# Altium PCB PCB_V1.PcbDoc
Units mm, origin at the board's own origin, x right, y up, seen from the top; angles counter-clockwise.
Board outline 152.4 x 101.6 mm, 2 copper layers (Top Layer, Bottom Layer); 43 components, 25 nets, 151 pads, 0 vias.
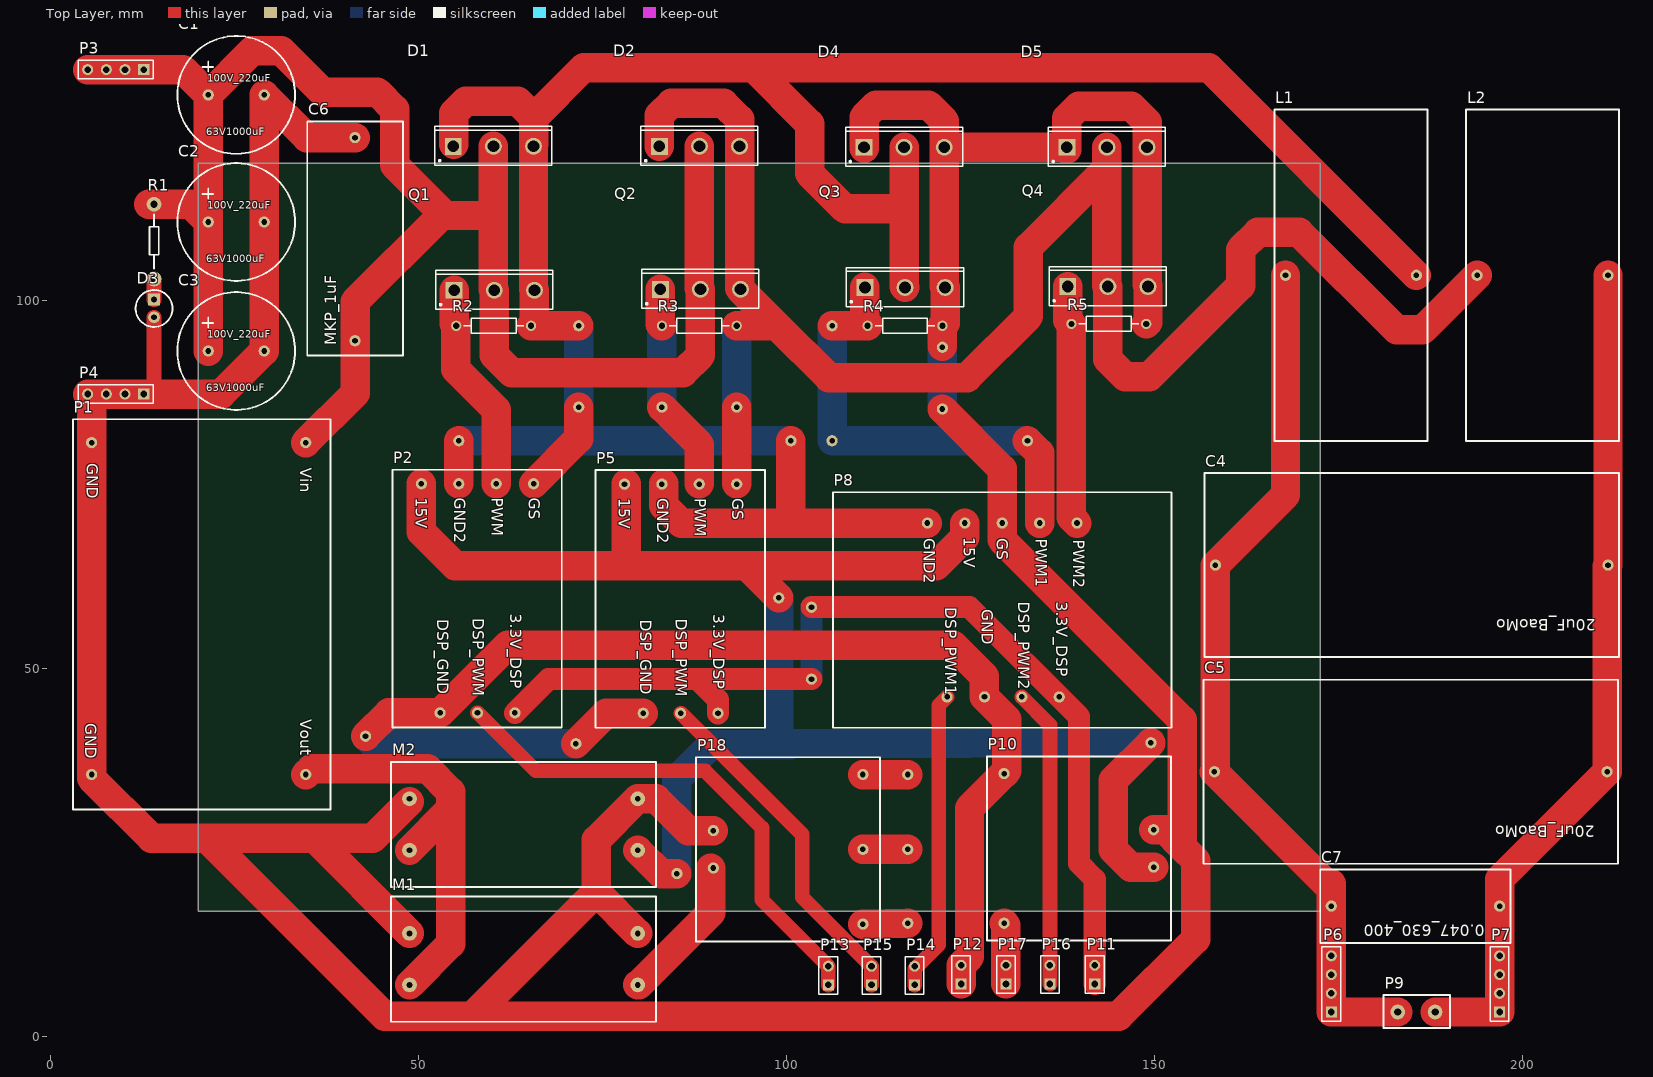
[diagram p0: Top Layer view]
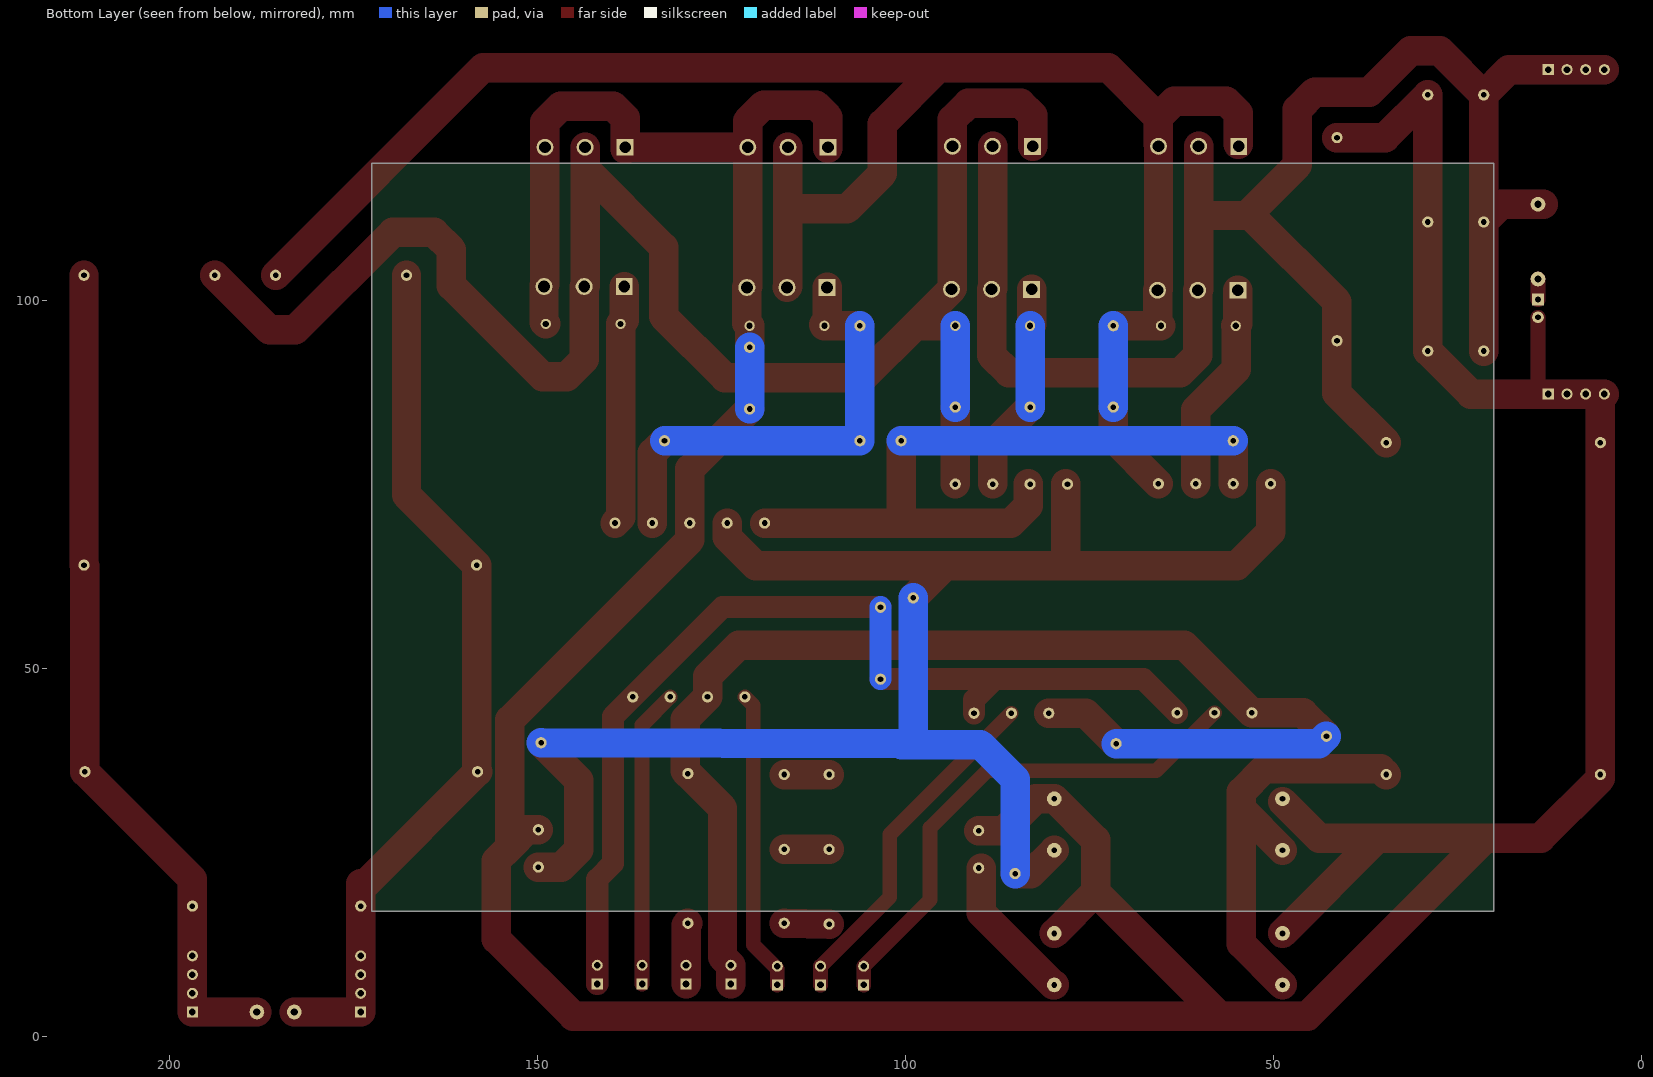
[diagram p1: Bottom Layer view, seen from below]

## Layer stack, top to bottom
Top Solder: solder mask 0.0102, Solder Resist, Dk 3.5
Top Layer: signal copper 0.0356
Dielectric 1: dielectric 0.32, FR-4, Dk 4.8
Bottom Layer: signal copper 0.0356
Bottom Solder: solder mask 0.0102, Solder Resist, Dk 3.5

## Board outline
20.066,17.018 172.466,17.018 172.466,118.618 20.066,118.618

## Design rules (kind name [scope] priority, off if disabled: settings)
Clearance [All] p1: gap=0.254 ignorepadtopadclearanceinfootprint=FALSE except(0: Arc-Hole Track-Hole SMDPad-Hole THPad-Hole Via-Hole Fill-Hole Poly-Hole Region-Hole Text-Hole)
PolygonConnect [All] p1: connectstyle=Relief reliefconductorwidth=0.254 reliefentries=4 polygonreliefangle="90 Angle" airgapwidth=0.254
RoutingVias [All] p1: holewidth=0.711 width=1.27 viastyle="Through Hole" minholewidth=0.711 minwidth=1.27 maxholewidth=0.711 maxwidth=1.27
SolderMaskExpansion [All] p1: expansion=0.102
Width [All] p1: maxlimit=5 minlimit=0.254 preferedwidth=0.254
30 further rules are at their usual default settings.

## Components (designator, comment, footprint, x,y, rotation, side; value= is the part's Value field where it differs from the comment)
C1 "Cap Pol1" C_1000uF_220uF 21.431,127.92 r0 top value=1000uF
C2 "Cap Pol1" C_1000uF_220uF 21.431,110.648 r0 top value=1000uF
C3 "Cap Pol1" C_1000uF_220uF 21.431,93.122 r0 top value=220uF
C4 "Cap Semi" C_20uF_BaoMo 211.582,64.039 r180 top value=20uF
C5 "Cap Semi" C_20uF_BaoMo 211.455,35.972 r180 top value=20uF
C6 "Cap Pol1" C_MKP_1uF 41.37,94.519 r90 top value=1uF
C7 "Cap Semi" C_0047_630_400_47nF 196.85,17.716 r180 top value=47nF
D1 "Diode" SiC-MOS 54.705,120.935 r0 top
D2 "Diode" SiC-MOS 82.699,120.935 r0 top
D3 "LED1" LED 14.065,100.107 r270 top
D4 "Diode" SiC-MOS 110.49,120.808 r0 top
D5 "Diode" SiC-MOS 138.049,120.808 r0 top
L1 "2mH" L_2mH 185.547,103.409 r180 top
L2 "2mH" L_2mH 211.582,103.409 r180 top
M1 "DC/DC_KeTiaoShengYaMoKuai" DC/DC-KeTiaoShengYaMoBan 79.768,7.016 r180 top
M2 "DC/DC_KeTiaoShengYaMoKuai" DC/DC-KeTiaoShengYaMoBan 79.768,25.304 r180 top
P1 "LM2596_Moldel" LM2596_Moldel 3.048,83.851 r270 top
P2 "SiC_Power" SiC_Power 46.45,76.993 r270 top
P3 "Header 4" HDR1X4 12.668,131.349 r180 top
P4 "Header 4" HDR1X4 12.668,87.28 r180 top
P5 "SiC_Power" SiC_Power 74.041,76.941 r270 top
P6 "Header 4" HDR1X4 173.99,3.333 r90 top
P7 "Header 4" HDR1X4 196.85,3.333 r90 top
P8 "SiC_Power_2" SiC_Power_2 106.934,79.152 r270 top
P9 "DuanZi" DuanZi 183.007,3.333 r0 top
P10 "Power_9-36V_5V" Power_9-36V/5V 149.86,23.018 r180 top
P11 "Header 2" HDR1X2 141.859,7.143 r90 top
P12 "Header 2" HDR1X2 123.698,7.143 r90 top
P13 "Header 2" HDR1X2 105.664,7.016 r90 top
P14 "Header 2" HDR1X2 117.39,7.016 r90 top
P15 "Header 2" HDR1X2 111.527,7.016 r90 top
P16 "Header 2" HDR1X2 135.763,7.143 r90 top
P17 "Header 2" HDR1X2 129.794,7.143 r90 top
P18 "Power_18-36V/+-15V" Power_18-36V/-+15V 90.043,25.431 r0 top
Q1 "NMOS-2" SiC-MOS 54.832,101.377 r0 top
Q2 "NMOS-2" SiC-MOS 82.826,101.504 r0 top
Q3 "NMOS-2" SiC-MOS 110.617,101.758 r0 top
Q4 "NMOS-2" SiC-MOS 138.176,101.885 r0 top
R1 "Res2" R 14.065,113.061 r270 top value=20k
R2 "Res2" AXIAL-0.4 60.198,96.551 r180 top value=10k
R3 "Res2" AXIAL-0.4 88.138,96.551 r180 top value=10k
R4 "Res2" AXIAL-0.4 116.078,96.551 r180 top value=10k
R5 "Res2" AXIAL-0.4 143.764,96.805 r180 top value=10k

## Footprints (in the part's own frame and the unit in brackets; to place one, negate y for a bottom-side part, rotate by r counter-clockwise, add the part's x,y. Pads: shape width x height; smd on the part's side, far side on the other; paste and mask are expansions set on the pad)
AXIAL-0.4 [mm] "Axial Device, Thru-Hole; 2 Leads; 0.4 in Pin Spacing"
  round 1.4 hole 0.85: 1(-5.08,0) 2(5.08,0)
  silkscreen extent -4.06,-1.02 4.06,1.02
C_20uF_BaoMo [mil]
  round 60 hole 30: 1(0,0) 2(2100,0)
  silkscreen extent -59,-492 2159,492
C_0047_630_400_47nF [mil]
  round 60 hole 30: 1(0,0) 2(900,0)
  silkscreen extent -59,-197 959,197
C_1000uF_220uF [mil]
  round 60 hole 30: 1(0,0) 2(299.21,0)
  silkscreen extent -165,-315 465,315
C_MKP_1uF [mil]
  round 60 hole 30: 1(0,0) 2(1086.61,0)
  silkscreen extent -79,-256 1173,256
DC/DC-KeTiaoShengYaMoBan [mm]
  round 2 hole 0.8: 1(0,0) 2(0,-7) 3(31,-7) 4(31,0)
  silkscreen extent -2.5,-12 33.5,5
DuanZi [mm]
  round 2 hole 1 unplated: 1(0,0) 2(5.08,0)
  silkscreen extent -1.91,-2.16 7.11,2.29
HDR1X2 [mm] "Connector; Header; 2 Position"
  rect 1.5x1.5 hole 0.9: 1(0,0)
  round 1.5 hole 0.9: 2(2.54,0)
  silkscreen extent -1.27,-1.27 3.81,1.27
HDR1X4 [mm] "Connector; Header; 4 Position"
  rect 1.5x1.5 hole 0.9: 1(0,0)
  round 1.5 hole 0.9: 2(2.54,0) 3(5.08,0) 4(7.62,0)
  silkscreen extent -1.27,-1.27 8.89,1.27
L_2mH [mil]
  round 60 hole 30: 1(0,0) 2(700,0)
  silkscreen extent -59,-886 759,886
LED [mm]
  rect 1.6x1.6 hole 0.8 unplated: 1(0,0)
  round 1.6 hole 0.8 unplated: 2(2.4,0)
  silkscreen extent -1.3,-2.5 3.7,2.5
LM2596_Moldel [mil]
  round 60 hole 30: 1(125,1245) 2(125,100) 3(1900,100) 4(1900,1245)
  silkscreen extent 0,0 2087,1378
Power_9-36V/5V [mil]
  round 60 hole 30: 1(0,0) 2(0,-200) 3(800,-500) 4(800,300)
  silkscreen extent -92,-592 892,392
Power_18-36V/-+15V [mil]
  round 60 hole 30: 1(0,100) 2(0,-100) 3(800,-400) 4(800,400) 5(800,0)
  silkscreen extent -92,-492 892,492
R [mm]
  round 2 hole 1: 1(0,0) 2(10.16,0)
  silkscreen extent 1.4,-0.63 8.76,0.64
SiC-MOS [mm]
  rect 2.3x2.3 hole 1.6: 1(0.011,0)
  round 2.3 hole 1.6: 2(5.461,0) 3(10.911,0)
  silkscreen extent -2.49,-2.6 13.41,2.7, body extent -2.49,-2.6 13.41,2.7, height 24.6
SiC_Power [mil]
  round 60 hole 30: 1(75,755) 2(75,555) 3(75,355) 4(75,155) 5(1300,255) 6(1300,455) 7(1300,655)
  silkscreen extent 0,0 1378,906
SiC_Power_2 [mil]
  round 60 hole 30: 1(370,1280) 2(370,1080) 3(370,880) 4(370,680) 5(370,480) 6(1300,585) 7(1300,785) 8(1300,985) 9(1300,1185)
  silkscreen extent 205,-25 1465,1786

## Part data
C1 C2 C3 C6: "Polarized Capacitor (Radial)", LatestRevisionDate=17-Jul-2002, LatestRevisionNote="Re-released for DXP Platform.", PackageDescription="Polarized Capacitor (Radial); 2 Leads", PackageReference=RB7.6-15, Published=8-Jun-2000, Publisher="Altium Limited"
C4 C5 C7: "Capacitor (Semiconductor SIM Model)", LatestRevisionDate=29-May-2009, LatestRevisionNote="IPC-7351 Footprint Added.", PackageDescription="Chip Capacitor", PackageReference=C1206, Published=8-Jun-2000, Publisher="Altium Limited"
D3: "Typical RED GaAs LED", LatestRevisionDate=08-Jul-2005, LatestRevisionNote="Mech Layer 1 removed.", PackageDescription="LED; 2 Leads", PackageReference=LED-1, Published=8-Jun-2000, Publisher="Altium Limited"
L1 L2: library part L
P3 P4 P6 P7: "Header, 4-Pin", LatestRevisionDate=17-Jul-2002, LatestRevisionNote="Re-released for DXP Platform.", Publisher="Altium Limited"
P11 P12 P13 P14 P15 P16 P17: "Header, 2-Pin", LatestRevisionDate=17-Jul-2002, LatestRevisionNote="Re-released for DXP Platform.", Publisher="Altium Limited"
Q1 Q2 Q3 Q4: "N-Channel Power MOSFET", ComponentLink1Description="Manufacturer Link", ComponentLink1URL=http://www.irf.com/, DatasheetVersion=PD-9.814, LatestRevisionDate=17-Jul-2002, LatestRevisionNote="Re-released for DXP Platform.", Note="Pin 2 is electrically connected to pin 4.", PackageDescription="TO, Thru-Hole, Vertical, Heatsink Mounted; 3 In-Line Leads; Pitch 2.54 mm", PackageReference=TO-220AB, PackageVersion=Feb-1997, Published=8-Jun-2000, Publisher="Altium Limited"
R1 R2 R3 R4 R5: "Resistor", LatestRevisionDate=17-Jul-2002, LatestRevisionNote="Re-released for DXP Platform.", PackageDescription="Axial Device, Thru-Hole; 2 Leads; 0.4 in Pin Spacing", PackageReference=AXIAL-0.4, Published=8-Jun-2000, Publisher="Altium Limited"

## Free pads (board coordinates)
  round 1.524 hole 0.762: 32(71.755,96.551) 33(71.755,85.502) 34(106.172,96.551) 35(121.158,93.63) 36(83.058,85.502) 37(93.218,85.502) 38(121.158,85.248) 39(106.172,80.93) 42(100.584,80.93) 43(55.467,80.93) 44(132.715,80.93) 48(98.933,59.594) 49(85.09,22.129) 50(149.479,39.909) 53(42.799,40.798) 55(71.374,39.782) 56(103.378,48.545) 57(103.378,58.324) 58(116.459,15.398) 59(116.459,25.431) 60(116.459,35.591)

## Nets (pads, with @x,y where several pads share a name; then routed paths per layer and width w, separated by ;. In a path a pad name is that pad's centre, name@x,y a point inside that pad or via, vN(x,y) a via of type N, cw(c..) or ccw(c..) an arc to the next point about the centre after c; other vN are vias at no path point)
5V: 
15V: 
15V2: 
20V2: 
-15V2: 
DSP_3.3V: 
DSP_5V: 
DSP_GND: 
DSP_PWM1: 
DSP_PWM2: 
DSP_PWM3: 
DSP_PWM4: 
GND: 
GND2: 
GS1: 
GS2: 
NetD3_1: 
PWM1: 
PWM2: 
PWM3: 
PWM4: 
VGND: 
Vin: 
VOUT1: 
VOUT2: 
pads on no net: C1.1 C1.2 C2.1 C2.2 C3.1 C3.2 C4.1 C4.2 C5.1 C5.2 C6.1 C6.2 C7.1 C7.2 D1.1 D1.2 D1.3 D2.1 D2.2 D2.3 D3.1 D3.2 D4.1 D4.2 D4.3 D5.1 D5.2 D5.3 L1.1 L1.2 L2.1 L2.2 M1.1 M1.2 M1.3 M1.4 M2.1 M2.2 M2.3 M2.4 P1.1 P1.2 P1.3 P1.4 P2.1 P2.2 P2.3 P2.4 P2.5 P2.6 P2.7 P3.1 P3.2 P3.3 P3.4 P4.1 P4.2 P4.3 P4.4 P5.1 P5.2 P5.3 P5.4 P5.5 P5.6 P5.7 P6.1 P6.2 P6.3 P6.4 P7.1 P7.2 P7.3 P7.4 P8.1 P8.2 P8.3 P8.4 P8.5 P8.6 P8.7 P8.8 P8.9 P9.1 P9.2 P10.1 P10.2 P10.3 P10.4 P11.1 P11.2 P12.1 P12.2 P13.1 P13.2 P14.1 P14.2 P15.1 P15.2 P16.1 P16.2 P17.1 P17.2 P18.1 P18.2 P18.3 P18.4 P18.5 Q1.1 Q1.2 Q1.3 Q2.1 Q2.2 Q2.3 Q3.1 Q3.2 Q3.3 Q4.1 Q4.2 Q4.3 R1.1 R1.2 R2.1 R2.2 R3.1 R3.2 R4.1 R4.2 R5.1 R5.2
copper on no net: | length 2706.6
  Top Layer w2: 12.668,87.28 14.065,88.677 14.065,97.707 ; 14.065,100.107 14.065,102.901 ; 58.007,43.973 58.039,43.973 65.913,36.099 88.9,36.099 96.647,28.352 96.647,18.573 105.664,9.556 105.664,7.016 ; 85.598,43.921 85.65,43.921 102.129,27.442 102.129,18.903 111.476,9.556 111.527,9.556 111.527,7.016 ; 117.39,7.016 117.39,9.217 120.65,12.477 120.65,44.989 121.793,46.132 ; 131.953,46.132 135.763,42.322 135.763,9.763 ; 135.763,7.143 135.763,9.683
  Top Layer w3: 63.087,43.973 67.659,48.545 87.884,48.545 ; 90.678,43.921 90.678,45.751 87.884,48.545 ; 103.378,48.545 87.884,48.545 ; 103.378,58.324 124.841,58.324 139.7,43.465 139.7,23.526 141.859,21.367 141.859,7.143
  Top Layer w4: 5.048,131.349 7.588,131.349 10.128,131.349 12.668,131.349 18.002,131.349 21.431,127.92 ; 13.335,113.061 14.065,113.061 19.018,113.061 21.431,110.648 ; 21.431,93.122 21.431,110.648 ; 34.671,35.591 35.433,36.353 51.251,36.353 54.356,33.248 54.356,30.892 ; 34.671,80.676 41.37,87.375 41.37,94.519 41.37,99.821 53.086,111.537 60.166,111.537 ; 41.37,122.119 34.832,122.119 29.031,127.92 29.031,110.648 29.031,93.122 23.189,87.28 12.668,87.28 10.128,87.28 7.588,87.28 5.048,87.28 5.588,86.74 5.588,80.676 5.588,35.591 5.588,35.083 13.716,26.955 21.177,26.955 ; 42.799,40.798 45.974,43.973 52.927,43.973 62.134,53.18 122.619,53.18 126.873,48.926 126.873,46.132 129.921,43.084 129.921,36.099 129.54,35.718 124.841,31.019 124.841,10.826 123.698,9.683 123.698,7.143 ; 48.768,7.016 54.356,12.604 54.356,30.892 ; 48.768,14.016 35.829,26.955 ; 48.768,25.304 54.356,30.892 ; 48.768,31.923 43.8,26.955 35.829,26.955 ; 50.387,75.088 50.387,68.541 54.952,63.976 78.232,63.976 ; 53.594,111.537 46.736,118.395 46.736,125.958 44.393,128.301 36.957,128.301 31.369,133.889 27.4,133.889 21.431,127.92 ; 54.77,121.189 54.77,125.413 56.388,127.031 63.5,127.031 65.67,124.861 ; 54.843,101.377 54.843,96.826 55.118,96.551 55.031,96.464 55.031,90.669 60.547,85.153 60.547,75.088 ; 55.467,75.088 55.467,80.93 ; 60.166,120.935 60.166,111.537 ; 65.616,120.935 65.616,101.504 65.743,101.377 65.743,97.016 65.278,96.551 71.755,96.551 ; 65.627,75.088 71.755,81.216 71.755,85.502 ; 65.67,121.189 65.67,124.861 ; 71.374,39.782 75.513,43.921 80.518,43.921 ; 78.232,75.088 78.232,63.976 ; 79.768,7.016 79.883,7.016 89.662,16.795 89.662,22.891 ; 79.768,14.016 74.168,19.616 ; 79.768,25.304 82.943,22.129 85.09,22.129 ; 82.71,120.935 82.71,125.159 84.328,126.777 91.44,126.777 93.61,124.607 93.61,120.935 93.61,101.631 93.737,101.504 98.69,96.551 ; 82.837,101.504 82.837,96.772 83.058,96.551 ; 83.058,85.502 88.16,80.4 88.16,75.11 88.138,75.088 ; 83.312,75.088 83.312,72.097 85.655,69.754 100.584,69.754 ; 88.16,120.935 88.16,101.631 88.287,101.504 88.287,92.544 85.944,90.201 62.636,90.201 60.293,92.544 60.293,101.377 60.166,101.504 60.166,111.537 ; 90.043,27.971 86.614,27.971 82.281,32.304 79.768,32.304 74.168,26.704 74.168,19.616 ; 93.218,75.088 93.218,85.502 ; 93.218,96.551 98.69,96.551 ; 98.933,59.594 94.551,63.976 ; 100.584,80.93 100.584,69.754 ; 106.172,96.551 110.998,96.551 ; 110.363,15.271 116.459,15.398 ; 110.363,25.431 116.459,25.431 ; 110.363,35.591 116.459,35.591 ; 110.523,120.681 110.523,124.905 112.141,126.523 119.253,126.523 121.423,124.353 121.423,120.808 ; 110.628,101.758 110.628,97.175 111.125,96.678 ; 115.951,120.808 115.951,112.426 ; 116.078,101.758 115.951,101.885 115.951,112.426 ; 119.126,69.754 100.584,69.754 ; 121.158,85.248 129.286,77.12 129.286,69.754 129.286,67.468 153.733,43.021 153.733,25.875 153.67,25.812 ; 121.158,93.756 121.158,96.551 ; 121.528,96.921 121.528,101.758 121.401,101.885 121.401,120.808 121.423,120.808 ; 124.206,69.754 124.206,67.849 120.333,63.976 94.551,63.976 ; 129.54,15.398 129.794,15.144 129.794,7.143 ; 132.715,80.93 134.366,79.279 134.366,69.754 ; 138.06,120.808 121.423,120.808 ; 138.082,120.554 138.082,124.778 139.7,126.396 146.812,126.396 148.982,124.226 148.982,120.808 ; 138.187,101.885 138.187,97.302 138.684,96.805 138.684,70.516 139.446,69.754 ; 143.51,120.808 143.51,117.887 ; 148.844,96.805 149.087,97.048 149.087,102.092 148.96,102.219 148.96,120.808 ; 149.479,39.909 144.399,34.829 144.399,25.361 146.742,23.018 149.86,23.018 ; 149.86,28.098 151.384,28.098 153.67,25.812 ; 167.767,103.409 167.767,73.564 158.242,64.039 158.242,36.099 158.115,35.972 173.355,20.732 173.99,20.732 173.99,17.716 173.99,10.953 173.99,8.413 173.99,5.873 173.99,3.333 183.007,3.333 ; 185.547,103.409 157.353,131.603 95.504,131.603 ; 188.087,3.333 196.85,3.333 196.85,5.873 196.85,8.413 196.85,10.953 196.85,17.716 196.85,21.367 211.455,35.972 211.455,63.912 211.582,64.039 211.582,103.409 ; 193.802,103.409 186.378,95.985 182.891,95.985 169.625,109.251 164.014,109.251 161.671,106.908 161.671,102.012 149.294,89.635 145.98,89.635 143.637,91.978 143.637,101.885 143.51,102.012 143.51,117.887 ; 21.177,26.955 45.37,2.762 57.314,2.762 ; 21.177,26.955 35.829,26.955 ; 21.431,110.648 21.431,127.92 ; 57.314,2.762 74.168,19.616 ; 57.314,2.762 145.098,2.762 155.575,13.239 155.575,23.907 153.67,25.812 ; 65.67,124.861 72.412,131.603 95.504,131.603 ; 78.232,63.976 94.551,63.976 ; 95.504,131.603 103.124,123.983 103.124,117.252 107.95,112.426 115.951,112.426 ; 98.69,96.551 105.739,89.502 124.523,89.502 132.842,97.821 132.842,107.219 143.51,117.887
  Bottom Layer w3: 103.378,48.545 103.378,58.324
  Bottom Layer w4: 42.799,40.798 43.815,39.782 71.374,39.782 ; 55.467,80.93 100.584,80.93 ; 71.755,85.502 71.755,96.551 ; 83.058,85.502 83.058,96.551 ; 85.09,22.129 85.09,34.956 89.801,39.667 100.469,39.667 100.592,39.79 149.479,39.909 ; 93.218,85.502 93.218,96.551 ; 98.933,39.667 98.933,59.594 ; 106.172,96.551 106.172,80.93 132.08,80.93 132.715,80.93 ; 121.158,85.248 121.158,93.63

## Text inside footprints (layer, text, board x,y; h text height)
C1: Top Overlay "100V_220uF" at 21.304,129.698 h1; Top Overlay "63V1000uF" at 21.177,122.459 h1
C2: Top Overlay "100V_220uF" at 21.304,112.426 h1; Top Overlay "63V1000uF" at 21.177,105.187 h1
C3: Top Overlay "100V_220uF" at 21.304,94.9 h1; Top Overlay "63V1000uF" at 21.177,87.661 h1
C4: Top Overlay "20uF_BaoMo" at 209.931,56.673 h1.52 r180
C5: Top Overlay "20uF_BaoMo" at 209.804,28.606 h1.52 r180
C6: Top Overlay "MKP_1uF" at 38.83,93.884 h1.52 r90
C7: Top Overlay "0.047_630_400" at 194.818,15.176 h1.52 r180
P1: Top Overlay "Vin" at 33.909,77.247 h1.52 r270; Top Overlay "GND" at 4.953,77.882 h1.52 r270; Top Overlay "GND" at 4.699,42.576 h1.52 r270; Top Overlay "Vout" at 33.909,43.084 h1.52 r270
P2: Top Overlay "GS" at 64.992,73.183 h1.52 r270; Top Overlay "PWM" at 59.912,73.183 h1.52 r270; Top Overlay "GND2" at 54.832,73.183 h1.52 r270; Top Overlay "15V" at 49.625,73.183 h1.52 r270; Top Overlay "3.3V_DSP" at 62.452,57.435 h1.52 r270; Top Overlay "DSP_PWM" at 57.372,56.8 h1.52 r270; Top Overlay "DSP_GND" at 52.546,56.673 h1.52 r270
P5: Top Overlay "GS" at 92.583,73.131 h1.52 r270; Top Overlay "PWM" at 87.503,73.131 h1.52 r270; Top Overlay "GND2" at 82.423,73.131 h1.52 r270; Top Overlay "15V" at 77.216,73.131 h1.52 r270; Top Overlay "3.3V_DSP" at 90.043,57.383 h1.52 r270; Top Overlay "DSP_PWM" at 84.963,56.748 h1.52 r270; Top Overlay "DSP_GND" at 80.137,56.621 h1.52 r270
P8: Top Overlay "PWM2" at 138.938,67.468 h1.52 r270; Top Overlay "PWM1" at 133.858,67.595 h1.52 r270; Top Overlay "GS" at 128.524,67.722 h1.52 r270; Top Overlay "15V" at 124.079,67.849 h1.52 r270; Top Overlay "GND2" at 118.618,67.722 h1.52 r270; Top Overlay "3.3V_DSP" at 136.652,59.086 h1.52 r270; Top Overlay "DSP_PWM2" at 131.445,59.086 h1.52 r270; Top Overlay "GND" at 126.492,58.07 h1.52 r270; Top Overlay "DSP_PWM1" at 121.539,58.324 h1.52 r270